# Altium PCB ESP32 with USBC PCB.PcbDoc (part 1 of 3)
Units mil, origin at the board's own origin, x right, y up, seen from the top; angles counter-clockwise.
Board outline 2700 x 1000 mil, 4 copper layers (L1, L2, L3, L4), stack 61.583 mil thick; 64 components, 73 nets, 299 pads, 161 vias.
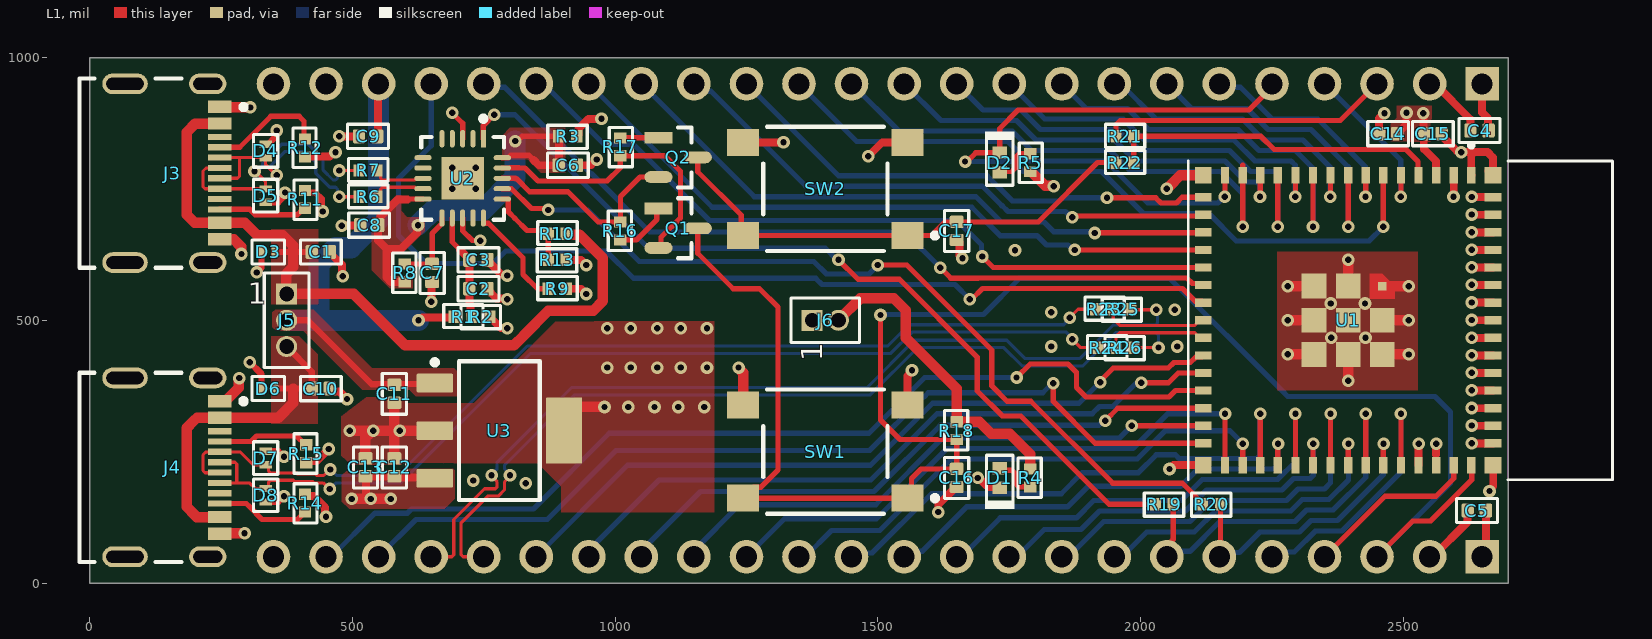
[diagram p0: L1 view]
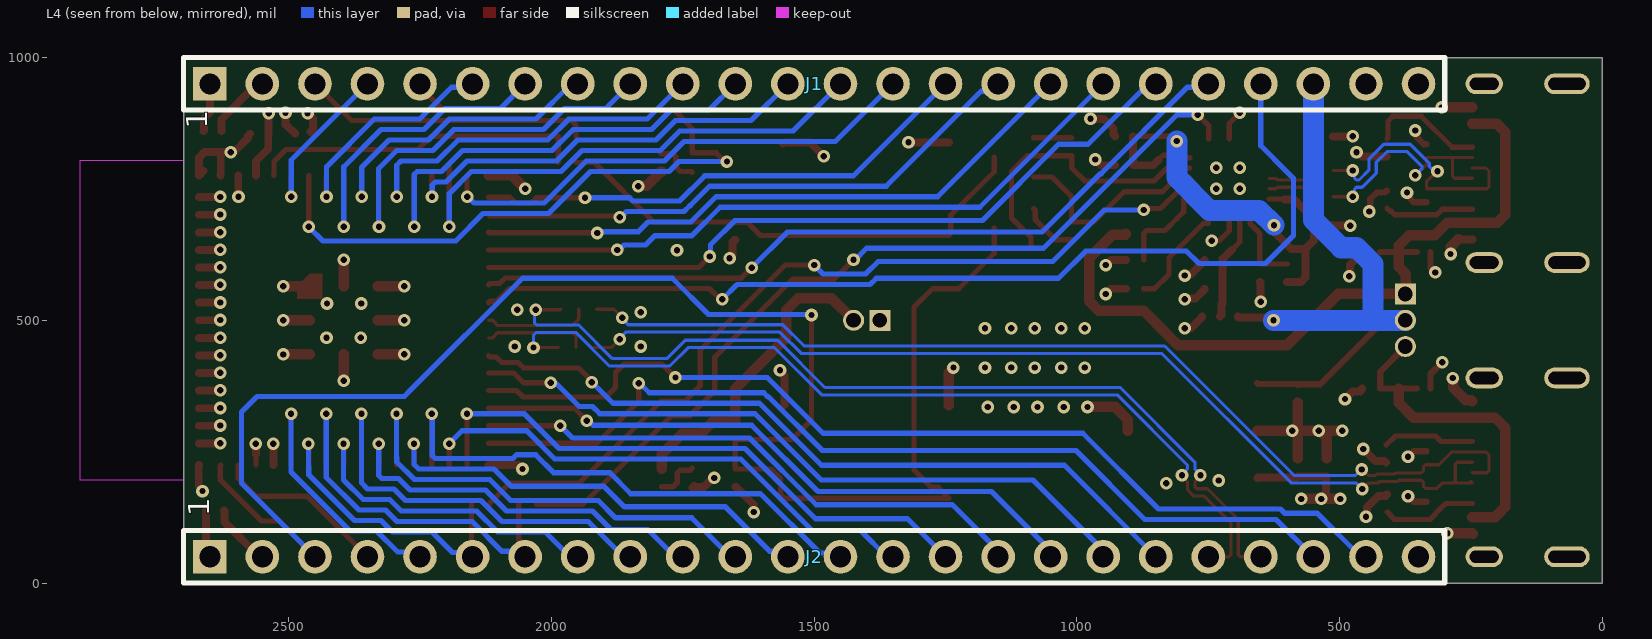
[diagram p1: L4 view, seen from below]
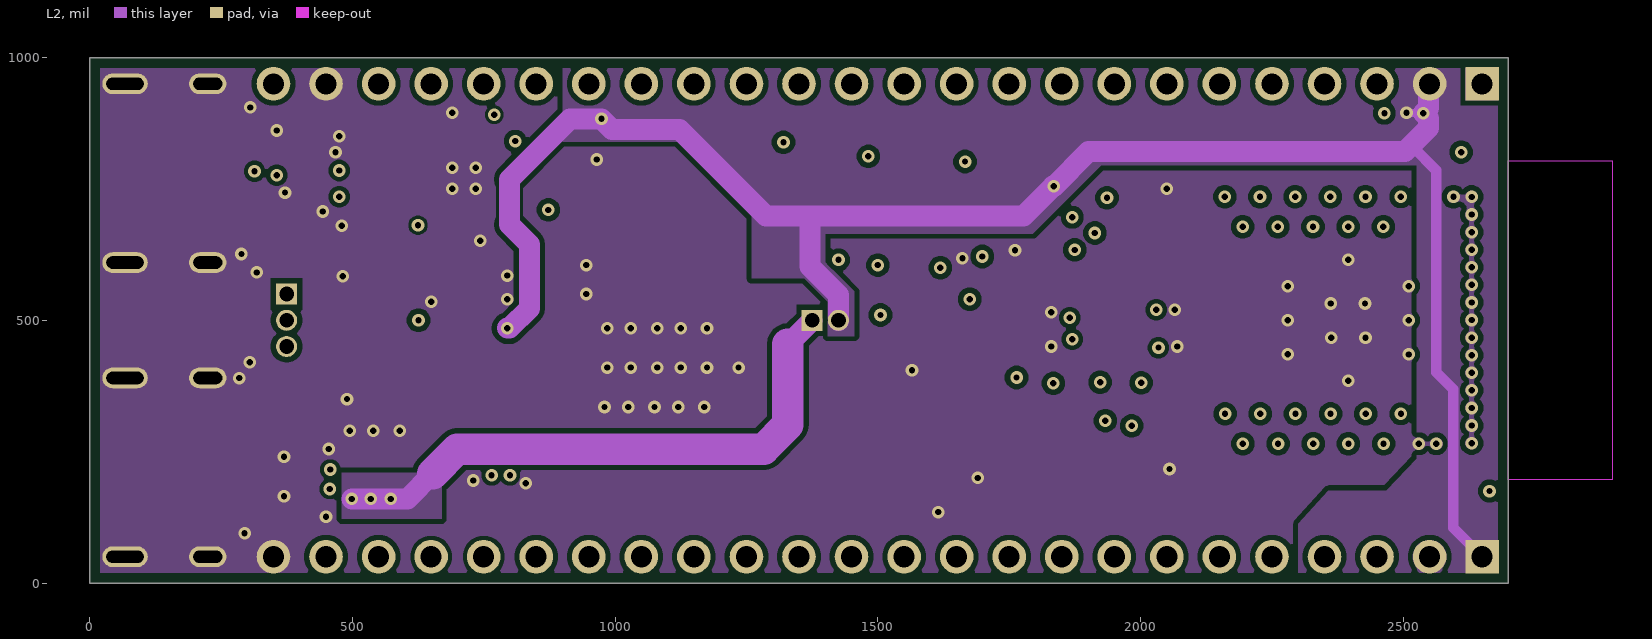
[diagram p2: L2]
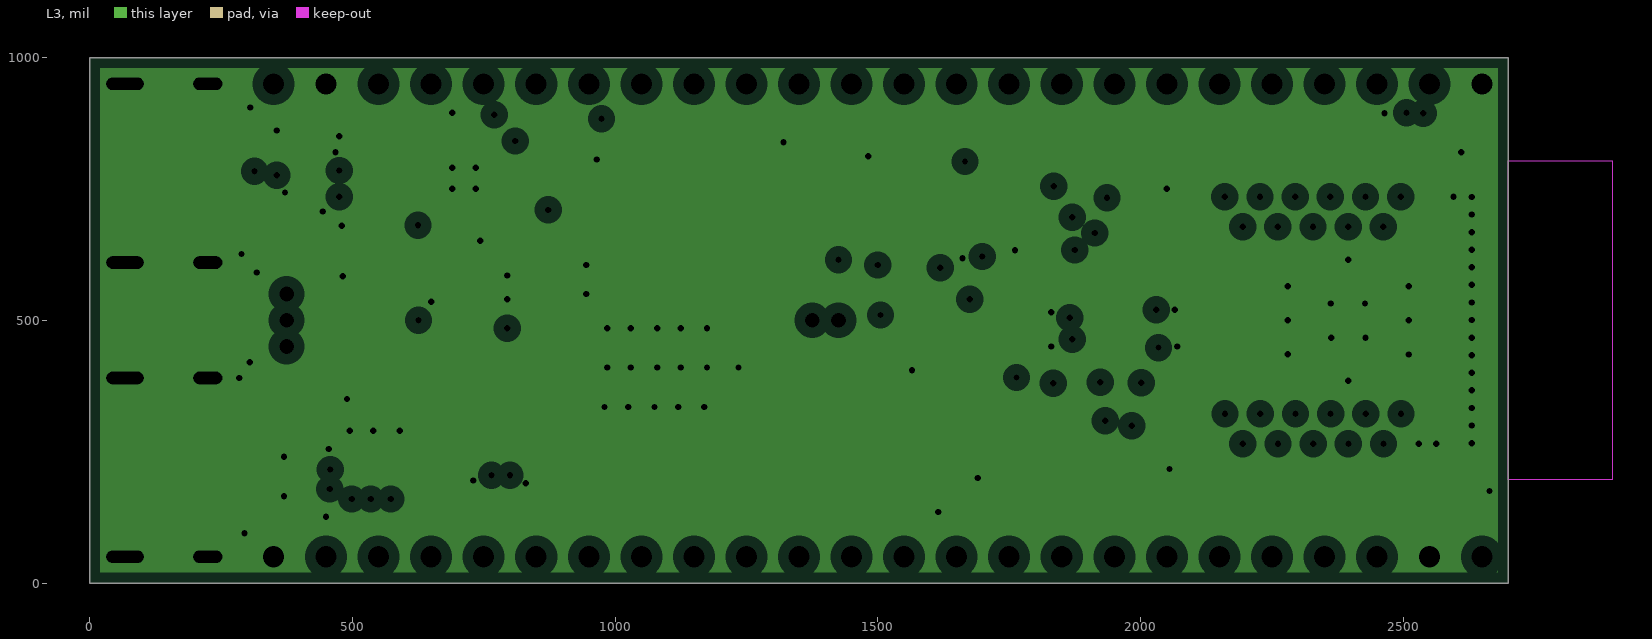
[diagram p3: L3, clearances drawn from the general rule]
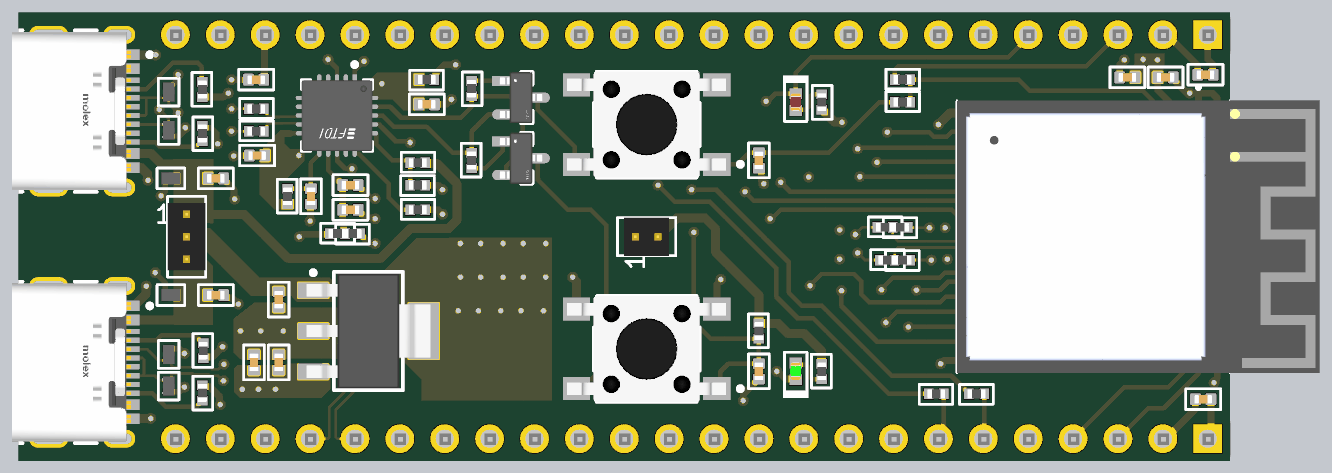
[diagram p4: 3D render of the assembled board from above, using the file's embedded part models]

## Layer stack, top to bottom
Top Solder: solder mask 0.4, Solder Resist, Dk 3.5
L1: signal copper 1.378
Dielectric 2: prepreg 3.9134, PP-006, Dk 4.1
L2: signal copper 0.5984
Dielectric 1: dielectric 49.8031, FR-4, Dk 4.8
L3: plane copper 0.5984, net GND
Dielectric 3: prepreg 3.9134, PP-006, Dk 4.1
L4: signal copper 1.378
Bottom Solder: solder mask 0.4, Solder Resist, Dk 3.5

## Board outline
0,0 2700,0 2700,1000 0,1000

## Design rules (kind name [scope] priority, off if disabled: settings)
Clearance SMALLER [WithinRoom('FTDI') OR WithinRoom('USBC2')   OR WithinRoom('USBC1')] p1: gap=6 ignorepadtopadclearanceinfootprint=FALSE
Clearance "DIFF90 Clearance" [InDifferentialPairClass('DIFF90')] p2: gap=8 ignorepadtopadclearanceinfootprint=FALSE
Clearance [All] p3: gap=10 ignorepadtopadclearanceinfootprint=FALSE except(6: SMDPad-SMDPad)
ComponentClearance R24R26 [InComponent('R24') vs InComponent('R26')] p1: gap=0 collisioncheckmode=3 verticalgap=0 showdistances=FALSE
ComponentClearance R23R25 [InComponent('R23') vs InComponent('R25')] p2: gap=0 collisioncheckmode=3 verticalgap=0 showdistances=FALSE
ComponentClearance R1R2 [InComponent('R1') vs InComponent('R2')] p3: gap=0 collisioncheckmode=3 verticalgap=0 showdistances=FALSE
ComponentClearance [All] p4: gap=10 collisioncheckmode=3 verticalgap=10 showdistances=FALSE
DiffPairsRouting DIFF90 [InDifferentialPairClass('DIFF90')] p1: maxlimit=8.1 minlimit=8 mostfreqgap=8 toplayer_minwidth=6.03 toplayer_maxwidth=6.23 toplayer_prefwidth=6.03 midlayer1_minwidth=5.1 midlayer1_maxwidth=5.2 midlayer1_prefwidth=5.1 bottomlayer_minwidth=6.03 bottomlayer_maxwidth=6.23 bottomlayer_prefwidth=6.03 maxuncoupledlength=500
PlaneClearance [All] p1: clearance=20
PlaneConnect [All] p1: pad.planeconnectstyle=Relief pad.reliefexpansion=20 pad.reliefentries=4 pad.reliefconductorwidth=20 pad.reliefairgap=10 via.planeconnectstyle=Direct via.reliefexpansion=20 via.reliefentries=4 via.reliefconductorwidth=10 via.reliefairgap=10
PolygonConnect [All] p1: connectstyle=Direct reliefconductorwidth=10 reliefentries=4 polygonreliefangle="90 Angle" airgapwidth=10
RoomDefinition FTDI [False vs False] p1: confinementstyle=ConfineIn formatcopy=TRUE lockcomponents=FALSE outline 607,660 809,660 809,905 607,905
RoomDefinition USBC1 [False vs False] p2: confinementstyle=ConfineIn formatcopy=TRUE lockcomponents=FALSE outline 190,930 310,930 310,630 190,630
RoomDefinition USBC2 [False vs False] p3: confinementstyle=ConfineIn formatcopy=TRUE lockcomponents=FALSE outline 199.55,369.55 305,369.55 305,69.55 199.55,69.55
RoutingVias [All] p1: holewidth=12 width=24 viastyle="Through Hole" minholewidth=12 minwidth=24 maxholewidth=12 maxwidth=24
SolderMaskExpansion [All] p1: expansion=2 istentingtop=FALSE
Width [All] p1: maxlimit=100 minlimit=10 preferedwidth=10 minimp=50.000000 maximp=50.000000 favimp=50.000000
26 further rules are at their usual default settings.

## Classes and differential pairs
differential pair class DIFF90: CON1_USB CON2_USB CON_ESP_USB ESP_USB FTDI_USB
differential pair FTDI_USB: +FTDI_USB_P -FTDI_USB_N
differential pair ESP_USB: +ESP_USB_P -ESP_USB_N
differential pair CON_ESP_USB: +CON_ESP_USB_P -CON_ESP_USB_N
differential pair CON2_USB: +CON2_USB_P -CON2_USB_N
differential pair CON1_USB: +CON1_USB_P -CON1_USB_N

## Components (designator, comment, footprint, x,y, rotation, side; value= is the part's Value field where it differs from the comment)
C1 "100nF, 50V" CAPC1005X65N 440,630 r180 top
C2 "4u7, 16V" CAPC1005X65N 740,560 r180 top
C3 "100nF, 50V" CAPC1005X65N 740,615 r180 top
C4 "100nF, 50V" CAPC1005X65N 2645,861 r180 top
C5 "100nF, 50V" CAPC1005X65N 2640,138 r0 top
C6 "100nF, 50V" CAPC1005X65N 910,795 r180 top
C7 "100nF, 50V" CAPC1005X65N 652,590 r90 top
C8 "100nF, 50V" CAPC1005X65N 532,681 r0 top
C9 "100nF, 50V" CAPC1005X65N 530,850 r0 top
C10 "100nF, 50V" CAPC1005X65N 440,370 r180 top
C11 "4u7, 16V" CAPC1005X65N 580,360 r90 top
C12 "10uF, 10V" CAPC1005X65N 580,220 r270 top
C13 "10uF, 10V" CAPC1005X65N 525,220 r270 top
C14 "10uF, 10V" CAPC1005X65N 2471,855 r0 top
C15 "100nF, 50V" CAPC1005X65N 2556,855 r180 top
C16 "1uF, 35V" CAPC1005X65N 1650,200 r270 top
C17 "100nF, 50V" CAPC1005X65N 1650,670 r90 top
D1 "GREEN" LED0402G 1732,200 r90 top
D2 "RED" LED0402R 1732,800 r270 top
D3 "AQ3045-01ETG" SOD882 340,630 r180 top locked
D4 "AQ3045-01ETG" SOD882 335,822.24 r90 top locked
D5 "AQ3045-01ETG" SOD882 335,737.2 r270 top locked
D6 "AQ3045-01ETG" SOD882 340,370 r180 top
D7 "AQ3045-01ETG" SOD882 335,237.8 r90 top
D8 "AQ3045-01ETG" SOD882 335,167.2 r270 top
J1 "22-28-4245" HDR_1X24_2.54MM 2650,950 r90 bottom locked
J2 "22-28-4245" HDR_1X24_2.54MM 2650,50 r90 bottom locked
J3 "2171790001" FP-2171790001-MFG 112.8,779.92 r270 top locked
J4 "2171790001" FP-2171790001-MFG 112.8,220.08 r270 top locked
J5 "FTS-103-01-F-S" HDR_1X3_1.27MM 375,550 r0 top locked
J6 "FTS-102-01-F-S" HDR_1X2_1.27MM 1375,500 r90 top locked
Q1 "SS8050-G" FP-SS8050-G-IPC_B 1120,675 r0 top
Q2 "SS8050-G" FP-SS8050-G-IPC_B 1120,810 r0 top
R1 "0R" RESC1005X37N 710.98,507 r0 top
R2 "0R" RESC1005X37N 744.99,507 r180 top
R3 "0R" RESC1005X37N 910,850 r180 top
R4 "1K" RESC1005X37N 1790,200 r90 top
R5 "1K" RESC1005X37N 1790,800 r270 top
R6 "27R" RESC1005X37N 530,735 r0 top
R7 "27R" RESC1005X37N 530,785 r0 top
R8 "0R" RESC1005X37N 600,590 r90 top
R9 "10K" RESC1005X37N 890,560 r0 top
R10 "4K7" RESC1005X37N 890,665 r0 top
R11 "5K1" RESC1005X37N 410,730 r270 top
R12 "5K1" RESC1005X37N 410,827.99 r90 top
R13 "10K" RESC1005X37N 890,615 r180 top
R14 "5K1" RESC1005X37N 410,152.01 r270 top
R15 "5K1" RESC1005X37N 412,246 r90 top
R16 "10K" RESC1005X37N 1010,670 r90 top
R17 "10K" RESC1005X37N 1010,830 r270 top
R18 "10K" RESC1005X37N 1650,290 r90 top
R19 "0R" RESC1005X37N 2045,150 r180 top
R20 "0R" RESC1005X37N 2135,150 r180 top
R21 "27R" RESC1005X37N 1970,850 r0 top
R22 "27R" RESC1005X37N 1970,800 r0 top
R23 "0R" RESC1005X37N 1930.98,521 r0 top locked
R24 "0R" RESC1005X37N 1935.98,448 r0 top locked
R25 "0R" RESC1005X37N 1965,521 r180 top locked
R26 "0R" RESC1005X37N 1970,448 r180 top locked
SW1 "PTS645SH50SMTR92 LFS" FP-PTS645SH50SMTR92LFS-MFG 1400,250 r180 top locked
SW2 "PTS645SH50SMTR92 LFS" FP-PTS645SH50SMTR92LFS-MFG 1400,750 r180 top locked
U1 "ESP32-S3-MINI-1-N8" XCVR_ESP32-S3-MINI-1-N8 2395.04,500 r270 top locked
U2 "FT231XQ-R" FP-QFN-20-IPC_B 710,770 r270 top locked
U3 "TL1963A-33DCYR" DCY0004A_N 780,290 r0 top locked

## Footprints (in the part's own frame and the unit in brackets; to place one, negate y for a bottom-side part, rotate by r counter-clockwise, add the part's x,y. Pads: shape width x height; smd on the part's side, far side on the other; paste and mask are expansions set on the pad)
CAPC1005X65N [mm]
  rrect25% 0.6x0.67 smd: 1(-0.437,0) 2(0.437,0)
  silkscreen extent -0.99,-0.59 0.99,0.59, body extent -0.5,-0.25 0.5,0.25, height 0.65
DCY0004A_N [mm] "SOT223, 4-Leads, Body 6.7x3.7mm, Pitch 2.3mm, IPC Medium Density"
  rrect11% 1.75x0.9 smd: 1(-3.125,2.3) 2(-3.125,0) 3(-3.125,-2.3)
  rrect6% 1.75x3.2 smd: 4(3.125,0)
  silkscreen extent -3.25,-3.35 1.95,3.42, body extent -3.5,-3.25 3.5,3.25, height 1.62
FP-2171790001-MFG [mm]
  rect 0.6x1.15 smd paste+0 mask+0: A1B12(-3.2,3.425) A4B9(-2.4,3.425) B1A12(3.2,3.425) B4A9(2.4,3.425)
  rect 0.3x1.15 smd paste+0 mask+0: A5(-1.25,3.425) A6(-0.25,3.425) A7(0.25,3.425) A8(1.25,3.425) B5(1.75,3.425) B6(0.75,3.425) B7(-0.75,3.425) B8(-1.75,3.425)
  rrect100% 1x1.8 hole 1.4 slot 0.6 at 0 deg paste-1000 mask+0: S1(-4.32,2.85) S2(4.32,2.85)
  rrect100% 1x2.2 hole 1.8 slot 0.6 at 0 deg paste-1000 mask+0: S3(-4.32,-1.15) S4(4.32,-1.15)
  silkscreen extent -4.57,-3.35 4.57,4.7, body extent -4.92,-3.45 4.92,4.1, height 0.25
FP-PTS645SH50SMTR92LFS-MFG [mm]
  rect 1.55x1.3 smd paste+0 mask+0: 1(-3.975,2.25) 2(3.975,2.25) 3(-3.975,-2.25) 4(3.975,-2.25)
  silkscreen extent -5.43,-3 3,3, body extent -4.5,-3 4.5,3, height 4.3
FP-QFN-20-IPC_B [mm]
  rect 0.84x0.242 smd paste+0 mask+0: 1(-1.916,1)
  rrect100% 0.84x0.242 smd paste+0 mask+0: 2(-1.916,0.5) 3(-1.916,0) 4(-1.916,-0.5) 5(-1.916,-1) 11(1.916,-1) 12(1.916,-0.5) 13(1.916,0) 14(1.916,0.5) 15(1.916,1)
  rrect100% 0.242x0.84 smd paste+0 mask+0: 6(-1,-1.916) 7(-0.5,-1.916) 8(0,-1.916) 9(0.5,-1.916) 10(1,-1.916) 16(1,1.916) 17(0.5,1.916) 18(0,1.916) 19(-0.5,1.916) 20(-1,1.916)
  rect 2.05x2.05 smd paste-1000 mask+0: 21(0,0)
  silkscreen extent -3.01,-2 2,2, body extent -2.59,-2.59 2.59,2.59, height 0.25
FP-SS8050-G-IPC_B [mm]
  rect 1.357x0.572 smd paste+0 mask+0: 1(-0.951,0.95)
  rrect100% 1.357x0.572 smd paste+0 mask+0: 2(-0.951,-0.95) 3(0.951,0)
  silkscreen extent 0,-1.45 0.65,1.45, body extent -1.88,-1.7 1.88,1.7, height 0.25
HDR_1X2_1.27MM [mil]
  rect 40x40 hole 28: 1(0,0)
  round 40 hole 28: 2(0,-50)
  silkscreen extent -42,-90 43,40, body extent -42,-75 43,25, height 154
HDR_1X3_1.27MM [mil]
  rect 40x40 hole 28: 1(0,0)
  round 40 hole 28: 2(0,-50) 3(0,-100)
  silkscreen extent -42,-140 42,40, body extent -42,-125 42,25, height 154
HDR_1X24_2.54MM [mil]
  rect 64x64 hole 40: 1(0,0)
  round 64 hole 40: 2(0,-100) 3(0,-200) 4(0,-300) 5(0,-400) 6(0,-500) 7(0,-600) 8(0,-700) 9(0,-800) 10(0,-900) 11(0,-1000) 12(0,-1100) 13(0,-1200) 14(0,-1300) 15(0,-1400) 16(0,-1500) 17(0,-1600) 18(0,-1700) 19(0,-1800) 20(0,-1900) 21(0,-2000) 22(0,-2100) 23(0,-2200) 24(0,-2300)
  silkscreen extent -50,-2350 50,50, body extent -50,-2349 48,51, height 386
LED0402G [mm]
  rect 0.6x0.7 smd: 1(-0.475,0) 2(0.475,0)
  silkscreen extent -1.5,-0.71 1.09,0.71, body extent -0.5,-0.3 0.5,0.3, height 0.21
LED0402R [mm]
  rect 0.6x0.7 smd: 1(-0.475,0) 2(0.475,0)
  silkscreen extent -1.5,-0.71 1.09,0.71, body extent -0.5,-0.3 0.5,0.3, height 0.2
RESC1005X37N [mm]
  rect 0.54x0.6 smd: 1(-0.432,0) 2(0.432,0)
  silkscreen extent -0.94,-0.53 0.97,0.58, body extent -0.5,-0.25 0.5,0.25, height 0.37
SOD882 [mm]
  rect 0.35x0.6 smd: 1(-0.325,0) 2(0.325,0)
  silkscreen extent -0.79,-0.58 0.79,0.58, body extent -0.54,-0.34 0.54,0.34, height 0.44
XCVR_ESP32-S3-MINI-1-N8 [mm]
  rect 0.8x0.4 smd: 1(-7,5.95) 2(-7,5.1) 3(-7,4.25) 4(-7,3.4) 5(-7,2.55) 6(-7,1.7) 7(-7,0.85) 8(-7,0) 9(-7,-0.85) 10(-7,-1.7) 11(-7,-2.55) 12(-7,-3.4) 13(-7,-4.25) 14(-7,-5.1) 15(-7,-5.95) 31(7,-5.95) 32(7,-5.1) 33(7,-4.25) 34(7,-3.4) 35(7,-2.55) 36(7,-1.7) 37(7,-0.85) 38(7,0) 39(7,0.85) 40(7,1.7) 41(7,2.55) 42(7,3.4) 43(7,4.25) 44(7,5.1) 45(7,5.95)
  rect 0.4x0.8 smd: 16(-5.95,-7) 17(-5.1,-7) 18(-4.25,-7) 19(-3.4,-7) 20(-2.55,-7) 21(-1.7,-7) 22(-0.85,-7) 23(0,-7) 24(0.85,-7) 25(1.7,-7) 26(2.55,-7) 27(3.4,-7) 28(4.25,-7) 29(5.1,-7) 30(5.95,-7) 46(5.95,7) 47(5.1,7) 48(4.25,7) 49(3.4,7) 50(2.55,7) 51(1.7,7) 52(0.85,7) 53(0,7) 54(-0.85,7) 55(-1.7,7) 56(-2.55,7) 57(-3.4,7) 58(-4.25,7) 59(-5.1,7) 60(-5.95,7)
  rect 1.2x1.2 smd: 61(0,0) 67(0,1.65) 68(1.65,1.65) 69(-1.65,0) 70(1.65,0) 71(-1.65,-1.65) 72(0,-1.65) 73(1.65,-1.65)
  rect 0.8x0.8 smd: 62(-7,7) 63(-7,-7) 64(7,-7) 65(7,7)
  rect 0.4x0.4 smd paste-1 mask+0: 66(-1.65,1.65)
  L1 region: -1.05,1.05 -2.25,1.05 -2.25,1.65 -1.65,2.25 -1.05,2.25
  Keep-Out Layer region: 7.7,7.725 -7.7,7.725 -7.7,12.775 7.7,12.775
  Keep-Out Layer region: 7.7,7.725 -7.7,7.725 -7.7,12.775 7.7,12.775
  silkscreen extent -8.55,-7.73 7.7,12.78, body extent -7.7,-7.71 7.7,12.79, height 2.56

## Part data
C1 C3 C4 C5 C6 C7 C8 C9 C10 C15 C17: library part CL05B104KB54PNC, "CAP CER 0.1UF 50V X7R 0402", Capacitance=100nF, Case/Package=0402, Dielectric Material=Ceramic, LCSC Part Number=C307331, Manufacturer="Samsung Electro-Mechanics", Max Operating Temperature=125°C, Min Operating Temperature=-55°C, Tolerance=10%, Voltage Rating=50V, Category="Ceramic Capacitors", China RoHS=Compliant, ComponentLink1Description=https://datasheet.octopart.com:443/CL05B104KB54PNC-Samsung-Electro-Mechanics-datasheet-182018727.pdf?src-supplier=IHS, ComponentLink1URL=https://datasheet.octopart.com:443/CL05B104KB54PNC-Samsung-Electro-Mechanics-datasheet-182018727.pdf?src-supplier=IHS, ComponentLink2Description=https://datasheet.octopart.com:443/CL05B104KB54PNC-Samsung-Electro-Mechanics-datasheet-138685816.pdf?src-supplier=Samsung+SCT, ComponentLink2URL=https://datasheet.octopart.com:443/CL05B104KB54PNC-Samsung-Electro-Mechanics-datasheet-138685816.pdf?src-supplier=Samsung+SCT, ComponentLink3Description=https://datasheet.octopart.com:443/CL05B104KB54PNC-Samsung-datasheet-8326407.pdf?src-supplier=TME, ComponentLink3URL=https://datasheet.octopart.com:443/CL05B104KB54PNC-Samsung-datasheet-8326407.pdf?src-supplier=TME, Country of Origin="Mainland China, Philippines, South Korea", Export Control Classification Number (ECCN) Code=EAR99, Harmonized Tariff Schedule (HTS) Code=8532.24.00.20, Height=500µm, Introduction Date=2018-07-31, Length=1mm, Lifecycle Status=Production, Manufacturer Part Number=CL05B104KB54PNC, Material=Ceramic, Mount="Surface Mount", Number of Terminals=2, Pricing 1="1=0.1, 10=0.036, 50=0.0246, 100=0.021, 500=0.01504, 1000=0.01387, 2500=0.01366, 5000=0.0129 (USD)", REACH SVHC=Yes, RoHS=Compliant, Schedule B="8532240020, 8532240020|8532240020|8532240020|8532240020|8532240020|8532240020|8532240020|8532240020|8532240020|8532240020|8532240020|8532240020|8532240020|8532240020|8532240020|8532240020|8532240020|8532240020|8532240020|8532240020|8532240020|8532240020|8532240020|85", Stock 1=262250, Supplier 1=DigiKey, Voltage Rating (DC)=50V, Width=500µm
C2 C11: library part CL05A475MO5NUNC, "CAP CER 4.7UF 16V X5R 0402", Capacitance=4.7µF, Case Code (Imperial)=0402, Case Code (Metric)=1005, Dielectric=X5R, Dielectric Material=Ceramic, LCSC Part Number=C318563, Manufacturer="Samsung Electro-Mechanics", Max Operating Temperature=85°C, Min Operating Temperature=-55°C, Supplier Part Number 1=1276-6836-1-ND, Tolerance=20%, Voltage Rating=16V, Case/Package=0402, Category="Ceramic Capacitors", China RoHS=Compliant, ComponentLink1Description=https://datasheet.octopart.com:443/CL05A475MO5NUNC-Samsung-Electro-Mechanics-datasheet-178175196.pdf?src-supplier=Farnell, ComponentLink1URL=https://datasheet.octopart.com:443/CL05A475MO5NUNC-Samsung-Electro-Mechanics-datasheet-178175196.pdf?src-supplier=Farnell, ComponentLink2Description=https://datasheet.octopart.com:443/CL05A475MO5NUNC-Samsung-Electro-Mechanics-datasheet-123102911.pdf?src-supplier=Future+Electronics, ComponentLink2URL=https://datasheet.octopart.com:443/CL05A475MO5NUNC-Samsung-Electro-Mechanics-datasheet-123102911.pdf?src-supplier=Future+Electronics, ComponentLink3Description=https://datasheet.octopart.com:443/CL05A475MO5NUNC-Samsung-Electro-Mechanics-datasheet-110226225.pdf?src-supplier=Future+Electronics, ComponentLink3URL=https://datasheet.octopart.com:443/CL05A475MO5NUNC-Samsung-Electro-Mechanics-datasheet-110226225.pdf?src-supplier=Future+Electronics, ComponentLink4Description=https://datasheet.octopart.com:443/CL05A475MO5NUNC-Samsung-Electro-Mechanics-datasheet-83567908.pdf?src-supplier=Future+Electronics, ComponentLink4URL=https://datasheet.octopart.com:443/CL05A475MO5NUNC-Samsung-Electro-Mechanics-datasheet-83567908.pdf?src-supplier=Future+Electronics, ComponentLink5Description=https://datasheet.octopart.com:443/CL05A475MO5NUNC-Samsung-Electro-Mechanics-datasheet-68297032.pdf?src-supplier=Future+Electronics, ComponentLink5URL=https://datasheet.octopart.com:443/CL05A475MO5NUNC-Samsung-Electro-Mechanics-datasheet-68297032.pdf?src-supplier=Future+Electronics, ComponentLink6Description=https://datasheet.octopart.com:443/CL05A475MO5NUNC-Samsung-Electro-Mechanics-datasheet-87580057.pdf?src-supplier=Future+Electronics, ComponentLink6URL=https://datasheet.octopart.com:443/CL05A475MO5NUNC-Samsung-Electro-Mechanics-datasheet-87580057.pdf?src-supplier=Future+Electronics, ComponentLink7Description=https://datasheet.octopart.com:443/CL05A475MO5NUNC-Samsung-Electro-Mechanics-datasheet-149136694.pdf?src-supplier=Future+Electronics, ComponentLink7URL=https://datasheet.octopart.com:443/CL05A475MO5NUNC-Samsung-Electro-Mechanics-datasheet-149136694.pdf?src-supplier=Future+Electronics, Height=500µm, Length=1mm, Lifecycle Status=Production, Manufacturer Part Number=CL05A475MO5NUNC, Material=Ceramic, Mount="Surface Mount", Number of Terminals=2, Pricing 1="1=0.08 (USD)", REACH SVHC=Yes, RoHS=Compliant, Schedule B="8532240020, 8532240020|8532240020, 8532240020|8532240020|8532240020, 8532240020|8532240020|8532240020|8532240020", Stock 1=160567, Supplier 1=DigiKey, Thickness=558.8µm, Voltage Rating (DC)=16V, Width=500µm
C12 C13 C14: library part CL05A106MP8NUB8, "CAP CER 10UF 10V X5R 0402", Capacitance=10µF, Case Code (Imperial)=0402, Case Code (Metric)=1005, Dielectric Material=Ceramic, LCSC Part Number=C307415, Manufacturer="Samsung Electro-Mechanics", Max Operating Temperature=85°C, Min Operating Temperature=-55°C, Supplier Part Number 1=1276-6830-1-ND, Tolerance=20%, Voltage Rating=10V, Case/Package=0402, Category="Ceramic Capacitors", China RoHS=Compliant, ComponentLink1Description=https://datasheet.octopart.com:443/CL05A106MP8NUB8-Samsung-Electro-Mechanics-datasheet-136460857.pdf?src-supplier=IHS, ComponentLink1URL=https://datasheet.octopart.com:443/CL05A106MP8NUB8-Samsung-Electro-Mechanics-datasheet-136460857.pdf?src-supplier=IHS, ComponentLink2Description=https://datasheet.octopart.com:443/CL05A106MP8NUB8-Samsung-Electro-Mechanics-datasheet-181551178.pdf?src-supplier=Newark, ComponentLink2URL=https://datasheet.octopart.com:443/CL05A106MP8NUB8-Samsung-Electro-Mechanics-datasheet-181551178.pdf?src-supplier=Newark, ComponentLink3Description=https://datasheet.octopart.com:443/CL05A106MP8NUB8-Samsung-Electro-Mechanics-datasheet-136031724.pdf?src-supplier=Newark, ComponentLink3URL=https://datasheet.octopart.com:443/CL05A106MP8NUB8-Samsung-Electro-Mechanics-datasheet-136031724.pdf?src-supplier=Newark, ComponentLink4Description=https://datasheet.octopart.com:443/CL05A106MP8NUB8-Samsung-Electro-Mechanics-datasheet-141346815.pdf?src-supplier=Samsung+SCT, ComponentLink4URL=https://datasheet.octopart.com:443/CL05A106MP8NUB8-Samsung-Electro-Mechanics-datasheet-141346815.pdf?src-supplier=Samsung+SCT, ComponentLink5Description=https://datasheet.octopart.com:443/CL05A106MP8NUB8-Samsung-Electro-Mechanics-datasheet-110326781.pdf?src-supplier=Future+Electronics, ComponentLink5URL=https://datasheet.octopart.com:443/CL05A106MP8NUB8-Samsung-Electro-Mechanics-datasheet-110326781.pdf?src-supplier=Future+Electronics, ComponentLink6Description=https://datasheet.octopart.com:443/CL05A106MP8NUB8-Samsung-Electro-Mechanics-datasheet-96443587.pdf?src-supplier=Future+Electronics, ComponentLink6URL=https://datasheet.octopart.com:443/CL05A106MP8NUB8-Samsung-Electro-Mechanics-datasheet-96443587.pdf?src-supplier=Future+Electronics, ComponentLink7Description=https://datasheet.octopart.com:443/CL05A106MP8NUB8-Samsung-Electro-Mechanics-datasheet-68297032.pdf?src-supplier=Future+Electronics, ComponentLink7URL=https://datasheet.octopart.com:443/CL05A106MP8NUB8-Samsung-Electro-Mechanics-datasheet-68297032.pdf?src-supplier=Future+Electronics, ComponentLink8Description=https://datasheet.octopart.com:443/CL05A106MP8NUB8-Samsung-Electro-Mechanics-datasheet-86032222.pdf?src-supplier=Future+Electronics, ComponentLink8URL=https://datasheet.octopart.com:443/CL05A106MP8NUB8-Samsung-Electro-Mechanics-datasheet-86032222.pdf?src-supplier=Future+Electronics, Country of Origin="Mainland China, Philippines, South Korea", Export Control Classification Number (ECCN) Code=EAR99, Harmonized Tariff Schedule (HTS) Code=8532.24.00.20, Height=800µm, Introduction Date=2014-02-27, Length=1mm, Lifecycle Status=Production, Manufacturer Part Number=CL05A106MP8NUB8, Material=Ceramic, Mount="Surface Mount", Number of Terminals=2, Pricing 1="1=0.13, 10=0.069 (USD)", REACH SVHC=Yes, RoHS=Compliant, Schedule B="8532240020, 8532240020|8532240020, 8532240020|8532240020|8532240020, 8532240020|8532240020|8532240020|8532240020", Stock 1=259358, Supplier 1=DigiKey, Thickness=889µm, Voltage Rating (DC)=10V, Width=500µm
C16: library part CL05A105KL5NRNC, "CAP CER 1UF 35V X5R 0402", Capacitance=1µF, Case Code (Imperial)=0402, Case Code (Metric)=1005, Dielectric Material=Ceramic, LCSC Part Number=C307413, Manufacturer="Samsung Electro-Mechanics", Max Operating Temperature=85°C, Min Operating Temperature=-55°C, Supplier Part Number 1=1276-6796-1-ND, Tolerance=10%, Voltage Rating=35V, Case/Package=0402, Category="Ceramic Capacitors", China RoHS=Compliant, ComponentLink1Description=https://datasheet.octopart.com:443/CL05A105KL5NRNC-Samsung-Electro-Mechanics-datasheet-182018568.pdf?src-supplier=IHS, ComponentLink1URL=https://datasheet.octopart.com:443/CL05A105KL5NRNC-Samsung-Electro-Mechanics-datasheet-182018568.pdf?src-supplier=IHS, ComponentLink2Description=https://datasheet.octopart.com:443/CL05A105KL5NRNC-Samsung-Electro-Mechanics-datasheet-141346806.pdf?src-supplier=Samsung+SCT, ComponentLink2URL=https://datasheet.octopart.com:443/CL05A105KL5NRNC-Samsung-Electro-Mechanics-datasheet-141346806.pdf?src-supplier=Samsung+SCT, ComponentLink3Description=https://datasheet.octopart.com:443/CL05A105KL5NRNC-Samsung-datasheet-8326407.pdf?src-supplier=TME, ComponentLink3URL=https://datasheet.octopart.com:443/CL05A105KL5NRNC-Samsung-datasheet-8326407.pdf?src-supplier=TME, Country of Origin="Mainland China, Philippines, South Korea", Export Control Classification Number (ECCN) Code=EAR99, Harmonized Tariff Schedule (HTS) Code=8532.24.00.20, Height=550µm, Introduction Date=2013-03-18, Length=990.6µm, Lifecycle Status=Production, Manufacturer Part Number=CL05A105KL5NRNC, Material=Ceramic, Mount="Surface Mount", Number of Terminals=2, Pricing 1="1=0.27, 10=0.159, 50=0.1154, 100=0.1019, 500=0.07928, 1000=0.07231, 2500=0.06496, 5000=0.06054 (USD)", REACH SVHC=Yes, RoHS=Compliant, Schedule B="8532240020, 8532240020|8532240020|8532240020|8532240020|8532240020", Stock 1=138065, Supplier 1=DigiKey, Thickness=558.8µm, Voltage Rating (DC)=35V, Width=508µm
D1: library part VLMTG1500-GS08, "LED GREEN 0402 SMD", Forward Current=20mA, Forward Voltage=3.1V, LCSC Part Number=C20346084, Manufacturer=Vishay, Max Operating Temperature=80°C, Min Operating Temperature=-20°C, Reverse Voltage=5V, Supplier Part Number 1=751-VLMTG1500-GS08CT-ND, Category=LEDs, ComponentLink1Description=https://datasheet.octopart.com:443/VLMTG1500-GS08-Vishay-datasheet-181477802.pdf?src-supplier=IHS, ComponentLink1URL=https://datasheet.octopart.com:443/VLMTG1500-GS08-Vishay-datasheet-181477802.pdf?src-supplier=IHS, ComponentLink2Description=http://sigma.octopart.com:80/rohs_statement/Vishay-company-15.pdf?src-supplier=Compliance+Statements, ComponentLink2URL=http://sigma.octopart.com:80/rohs_statement/Vishay-company-15.pdf?src-supplier=Compliance+Statements, Country of Origin="Mainland China", Harmonized Tariff Schedule (HTS) Code=8541.40.20.00, Height=350µm, Introduction Date=2017-05-22, Lifecycle Status=Production, Luminous Intensity=28mcd, Manufacturer Part Number=VLMTG1500-GS08, Mount="Surface Mount", Number of Circuits=1, Number of Terminals=2, Peak Wavelength=527.5nm, Pricing 1="1=0.33, 10=0.229, 100=0.1617, 500=0.13126, 1000=0.12121 (USD)", RoHS=Compliant, Shape=Rectangular, Stock 1=14859, Supplier 1=DigiKey, Terminal Pitch=675µm, Viewing Angle=130°
D2: library part VLMS1500-GS08, "LED RED 0402 SMD", Case Code (Imperial)=0402, Case Code (Metric)=1005, Color=Red, Forward Current=30mA, Forward Voltage=2.4V, LCSC Part Number=C511370, Manufacturer=Vishay, Max Operating Temperature=85°C, Min Operating Temperature=-30°C, Power Rating=75mW, Reverse Voltage=5V, Supplier Part Number 1=VLMS1500-GS08CT-ND, Test Current=20mA, Case/Package=0402, Category=LEDs, ComponentLink1Description=https://datasheet.octopart.com:443/VLMS1500-GS08-Vishay-datasheet-181477802.pdf?src-supplier=IHS, ComponentLink1URL=https://datasheet.octopart.com:443/VLMS1500-GS08-Vishay-datasheet-181477802.pdf?src-supplier=IHS, ComponentLink2Description=https://datasheet.octopart.com:443/VLMS1500-GS08-Vishay-datasheet-21227148.pdf?src-supplier=Future+Electronics, ComponentLink2URL=https://datasheet.octopart.com:443/VLMS1500-GS08-Vishay-datasheet-21227148.pdf?src-supplier=Future+Electronics, ComponentLink3Description=https://datasheet.octopart.com:443/VLMS1500-GS08-Vishay-datasheet-102762782.pdf?src-supplier=Future+Electronics, ComponentLink3URL=https://datasheet.octopart.com:443/VLMS1500-GS08-Vishay-datasheet-102762782.pdf?src-supplier=Future+Electronics, ComponentLink4Description=https://datasheet.octopart.com:443/VLMS1500-GS08-Vishay-datasheet-33014519.pdf?src-supplier=element14+APAC, ComponentLink4URL=https://datasheet.octopart.com:443/VLMS1500-GS08-Vishay-datasheet-33014519.pdf?src-supplier=element14+APAC, ComponentLink5Description=https://datasheet.octopart.com:443/VLMS1500-GS08-Vishay-datasheet-68326145.pdf?src-supplier=TME, ComponentLink5URL=https://datasheet.octopart.com:443/VLMS1500-GS08-Vishay-datasheet-68326145.pdf?src-supplier=TME, ComponentLink6Description=https://datasheet.octopart.com:443/VLMS1500-GS08-Vishay-Siliconix-datasheet-62309867.pdf?src-supplier=RS+(Formerly+Allied+Electronics), ComponentLink6URL=https://datasheet.octopart.com:443/VLMS1500-GS08-Vishay-Siliconix-datasheet-62309867.pdf?src-supplier=RS+(Formerly+Allied+Electronics), ComponentLink7Description=https://datasheet.octopart.com:443/VLMS1500-GS08-Vishay-datasheet-62332426.pdf?src-supplier=Newark, ComponentLink7URL=https://datasheet.octopart.com:443/VLMS1500-GS08-Vishay-datasheet-62332426.pdf?src-supplier=Newark, ComponentLink8Description=https://datasheet.octopart.com/VLMS1500-GS08-Vishay-datasheet-16093911.pdf, ComponentLink8URL=https://datasheet.octopart.com/VLMS1500-GS08-Vishay-datasheet-16093911.pdf, ComponentLink9Description=http://sigma.octopart.com:80/rohs_statement/Vishay-company-15.pdf?src-supplier=Compliance+Statements, ComponentLink9URL=http://sigma.octopart.com:80/rohs_statement/Vishay-company-15.pdf?src-supplier=Compliance+Statements, Country of Origin="Mainland China", Dominant Wavelength=631nm, Harmonized Tariff Schedule (HTS) Code=8541.40.20.00, Height=350µm, Illumination Color=Red, Introduction Date=2012-07-08, Lead Free="Lead Free", Length=1mm, Lens Style="Rectangular, Square", Lifecycle Status=Production, Luminous Intensity=18mcd, Manufacturer Part Number=VLMS1500-GS08, Mount="Surface Mount", Number of Circuits=1, Number of LEDs=1, Number of Pins=2, Number of Terminals=2, Packaging="Cut Tape", Peak Wavelength=631nm, Pricing 1="1=0.25, 10=0.17, 100=0.1194, 500=0.09602, 1000=0.08829 (USD)", Radiation Hardening=No, REACH SVHC=Yes, RoHS=Compliant, Schedule B="8541402000, 8541402000|8541402000|8541402000|8541402000|8541402000", Shape=Rectangular, Stock 1=79453, Supplier 1=DigiKey, Terminal Pitch=675µm, Viewing Angle=130°, Wavelength=631nm, Width=500µm
D3 D4 D5 D6 D7 D8: "TVS DIODE 5.3VWM 12VC SOD882", Breakdown Voltage=7.8V, Clamping Voltage=12V, LCSC Part Number=C3710326, Leakage Current=100nA, Manufacturer=Littelfuse, Max Breakdown Voltage=9V, Max Operating Temperature=150°C, Min Breakdown Voltage=6.8V, Min Operating Temperature=-40°C, Operating Supply Voltage=5.3V, Peak Pulse Power=40W, Supplier Part Number 1=F9321CT-ND, Category="TVS Diodes", ComponentLink1Description=https://datasheet.octopart.com:443/AQ3045-01ETG-Littelfuse-datasheet-180606588.pdf?src-supplier=IHS, ComponentLink1URL=https://datasheet.octopart.com:443/AQ3045-01ETG-Littelfuse-datasheet-180606588.pdf?src-supplier=IHS, ComponentLink2Description=https://datasheet.octopart.com:443/AQ3045-01ETG-Littelfuse-datasheet-140480283.pdf?src-supplier=ODG+(Origin+Data+Global), ComponentLink2URL=https://datasheet.octopart.com:443/AQ3045-01ETG-Littelfuse-datasheet-140480283.pdf?src-supplier=ODG+(Origin+Data+Global), ComponentLink3Description=https://datasheet.octopart.com:443/AQ3045-01ETG-Littelfuse-datasheet-101609968.pdf?src-supplier=Farnell, ComponentLink3URL=https://datasheet.octopart.com:443/AQ3045-01ETG-Littelfuse-datasheet-101609968.pdf?src-supplier=Farnell, ComponentLink4Description=https://datasheet.octopart.com:443/AQ3045-01ETG-Littelfuse-datasheet-183003566.pdf?src-supplier=JRH+Electronics, ComponentLink4URL=https://datasheet.octopart.com:443/AQ3045-01ETG-Littelfuse-datasheet-183003566.pdf?src-supplier=JRH+Electronics, ComponentLink5Description=https://datasheet.octopart.com:443/AQ3045-01ETG-Littelfuse-datasheet-170904929.pdf?src-supplier=Future+Electronics, ComponentLink5URL=https://datasheet.octopart.com:443/AQ3045-01ETG-Littelfuse-datasheet-170904929.pdf?src-supplier=Future+Electronics, Lifecycle Status=Production, Manufacturer Part Number=AQ3045-01ETG, Mount="Surface Mount", Number of Channels=1, Number of Elements=1, Number of Terminals=2, Packaging="Cut Tape", Peak Reverse Current=100nA, Polarity=Bidirectional, Pricing 1="1=0.43, 10=0.262, 100=0.138, 500=0.131 (USD)", REACH SVHC=Yes, Reverse Standoff Voltage=5.3V, RoHS=Compliant, Stock 1=26845, Supplier 1=DigiKey
J1 J2: "CONN HEADER VERT 24POS 2.54MM", Contact Resistance=20mΩ, Current Rating=4A, Housing Color=Black, Insulation Resistance=50GΩ, LCSC Part Number=C7145888, Manufacturer=Molex, Manufacturer Lifecycle Status=ACTIVE, Max Operating Temperature=75°C, Min Operating Temperature=-40°C, Supplier Part Number 1=900-0022284245-ND, Category="Headers and Wire Housings", China RoHS=Compliant, ComponentLink1Description=https://datasheet.octopart.com:443/22-28-4245-Molex-datasheet-166051265.pdf?src-supplier=IHS, ComponentLink1URL=https://datasheet.octopart.com:443/22-28-4245-Molex-datasheet-166051265.pdf?src-supplier=IHS, ComponentLink2Description=https://datasheet.octopart.com:443/022284245-Molex-datasheet-8337137.pdf?src-supplier=Arrow+Electronics, ComponentLink2URL=https://datasheet.octopart.com:443/022284245-Molex-datasheet-8337137.pdf?src-supplier=Arrow+Electronics, ComponentLink3Description=https://datasheet.octopart.com:443/22-28-4245-Molex-datasheet-16300812.pdf?src-supplier=Molex, ComponentLink3URL=https://datasheet.octopart.com:443/22-28-4245-Molex-datasheet-16300812.pdf?src-supplier=Molex, ComponentLink4Description=https://sigma.octopart.com:443/16300370/technical_drawing/Molex-22-28-4245.pdf?src-supplier=Molex, ComponentLink4URL=https://sigma.octopart.com:443/16300370/technical_drawing/Molex-22-28-4245.pdf?src-supplier=Molex, ComponentLink5Description=https://datasheet.octopart.com:443/22-28-4245-Molex-datasheet-4210.pdf?src-supplier=DigiKey, ComponentLink5URL=https://datasheet.octopart.com:443/22-28-4245-Molex-datasheet-4210.pdf?src-supplier=DigiKey, ComponentLink6Description=http://sigma.octopart.com:80/16300813/rohs_statement/Molex-22-28-4245.pdf?src-supplier=Compliance+Statements, ComponentLink6URL=http://sigma.octopart.com:80/16300813/rohs_statement/Molex-22-28-4245.pdf?src-supplier=Compliance+Statements, ComponentLink7Description=http://sigma.octopart.com:80/reach_statement/Molex-company-74.pdf?src-supplier=Compliance+Statements, ComponentLink7URL=http://sigma.octopart.com:80/reach_statement/Molex-company-74.pdf?src-supplier=Compliance+Statements, ComponentLink8Description=http://sigma.octopart.com:80/rohs_statement/Molex-company-73.pdf?src-supplier=Compliance+Statements, ComponentLink8URL=http://sigma.octopart.com:80/rohs_statement/Molex-company-73.pdf?src-supplier=Compliance+Statements, ComponentLink9Description=http://sigma.octopart.com:80/conflict_mineral_statement/Molex-company-72.pdf?src-supplier=Compliance+Statements, ComponentLink9URL=http://sigma.octopart.com:80/conflict_mineral_statement/Molex-company-72.pdf?src-supplier=Compliance+Statements, Contact Gender=Male, Contact Material=Brass, Contact Plating=Gold, Country of Origin=US, Export Control Classification Number (ECCN) Code=EAR99, Gender=Male, Harmonized Tariff Schedule (HTS) Code=8536.69.40.40, Introduction Date=1994-12-01, Lead Free="Lead Free", Lifecycle Status=Production, Manufacturer Part Number=22-28-4245, Mount="Through Hole", Number of Circuits=24, Number of Contacts=24, Number of Pins=24, Number of Positions=24, Number of Rows=1, Orientation=Vertical, Packaging=Bulk, Pitch=2.54mm, Plating=Tin, Plating Thickness=381nm, Pricing 1="1=1.21, 10=1.024, 100=0.8699, 500=0.77638, 1000=0.73932, 5000=0.65998, 10000=0.62851 (USD)", REACH SVHC=Yes, RoHS=Compliant, Schedule B="8536694040, 8536694040|8536694040|8536694040|8536694040|8536694040", Stock 1=1256, Supplier 1=DigiKey, Terminal Pitch=2.54mm, Termination=Solder
J3 J4: library part 217179-0001, "CONN RCP USB2.0 TYP C 24P SMD RA", Contact Resistance=50mΩ, Current Rating=1.25A, Dielectric Material=Polyamide, Insulation Resistance=100MΩ, LCSC Part Number=C3197684, Manufacturer=Molex, Max Operating Temperature=85°C, Min Operating Temperature=-40°C, Supplier Part Number 1=900-2171790001CT-ND, Voltage Rating=30V, Category="USB Connectors", China RoHS=Compliant, ComponentLink1Description=https://datasheet.octopart.com:443/217179-0001-Molex-datasheet-158871109.pdf?src-supplier=ODG+(Origin+Data+Global), ComponentLink1URL=https://datasheet.octopart.com:443/217179-0001-Molex-datasheet-158871109.pdf?src-supplier=ODG+(Origin+Data+Global), ComponentLink2Description=https://sigma.octopart.com:443/158871110/technical_drawing/Molex-217179-0001.pdf?src-supplier=Upverter, ComponentLink2URL=https://sigma.octopart.com:443/158871110/technical_drawing/Molex-217179-0001.pdf?src-supplier=Upverter, ComponentLink3Description=https://datasheet.octopart.com:443/217179-0001-Molex-datasheet-164573281.pdf?src-supplier=RS+(Formerly+Allied+Electronics), ComponentLink3URL=https://datasheet.octopart.com:443/217179-0001-Molex-datasheet-164573281.pdf?src-supplier=RS+(Formerly+Allied+Electronics), ComponentLink4Description=http://sigma.octopart.com:80/reach_statement/Molex-company-74.pdf?src-supplier=Compliance+Statements, ComponentLink4URL=http://sigma.octopart.com:80/reach_statement/Molex-company-74.pdf?src-supplier=Compliance+Statements, ComponentLink5Description=http://sigma.octopart.com:80/rohs_statement/Molex-company-73.pdf?src-supplier=Compliance+Statements, ComponentLink5URL=http://sigma.octopart.com:80/rohs_statement/Molex-company-73.pdf?src-supplier=Compliance+Statements, ComponentLink6Description=http://sigma.octopart.com:80/conflict_mineral_statement/Molex-company-72.pdf?src-supplier=Compliance+Statements, ComponentLink6URL=http://sigma.octopart.com:80/conflict_mineral_statement/Molex-company-72.pdf?src-supplier=Compliance+Statements, Contact Gender=Female, Contact Material="Gold, Nickel", Country of Origin="Mainland China", Export Control Classification Number (ECCN) Code=EAR99, Gender=Receptacle, Harmonized Tariff Schedule (HTS) Code=8536.69.40.30, Height=3.36mm, Introduction Date=2021-08-30, Lifecycle Status=Production, Manufacturer Part Number=217179-0001, Number of Contacts=16, Number of Pins=16, Number of Ports=1, Number of Rows=1, Pricing 1="1=0.83, 10=0.704, 25=0.6596, 50=0.628, 100=0.598, 250=0.56052, 500=0.53374 (USD)", REACH SVHC=Yes, RoHS=Compliant, Shell Finish=Nickel, Shell Material="Stainless Steel", Stock 1=24454, Supplier 1=DigiKey, Terminal Pitch=500µm, USB Standard="USB 2.0"
J5: "CONN HEADER VERT 3POS 1.27MM", LCSC Part Number=C3333578, Manufacturer=Samtec, Manufacturer Lifecycle Status=PRODUCTION, Supplier Part Number 1=612-FTS-103-01-F-S-ND, Category="Headers and Wire Housings", ComponentLink1Description=https://datasheet.octopart.com:443/FTS-103-01-F-S-Samtec-datasheet-97029283.pdf?src-supplier=Newark, ComponentLink1URL=https://datasheet.octopart.com:443/FTS-103-01-F-S-Samtec-datasheet-97029283.pdf?src-supplier=Newark, ComponentLink2Description=https://datasheet.octopart.com:443/FTS-103-01-F-S-Samtec-datasheet-165596534.pdf?src-supplier=Newark, ComponentLink2URL=https://datasheet.octopart.com:443/FTS-103-01-F-S-Samtec-datasheet-165596534.pdf?src-supplier=Newark, ComponentLink3Description=https://sigma.octopart.com:443/97029285/technical_drawing/Samtec-FTS-103-01-F-S.pdf?src-supplier=element14+APAC, ComponentLink3URL=https://sigma.octopart.com:443/97029285/technical_drawing/Samtec-FTS-103-01-F-S.pdf?src-supplier=element14+APAC, ComponentLink4Description=https://datasheet.octopart.com:443/FTS-103-01-F-S-Samtec-datasheet-118493358.pdf?src-supplier=Electro+Sonic, ComponentLink4URL=https://datasheet.octopart.com:443/FTS-103-01-F-S-Samtec-datasheet-118493358.pdf?src-supplier=Electro+Sonic, ComponentLink5Description=https://datasheet.octopart.com:443/FTS-103-01-F-S-Samtec-datasheet-176663378.pdf?src-supplier=Toby+Electronics, ComponentLink5URL=https://datasheet.octopart.com:443/FTS-103-01-F-S-Samtec-datasheet-176663378.pdf?src-supplier=Toby+Electronics, ComponentLink6Description=https://datasheet.octopart.com:443/FTS-103-01-F-S-Samtec-datasheet-116535195.pdf?src-supplier=Toby+Electronics, ComponentLink6URL=https://datasheet.octopart.com:443/FTS-103-01-F-S-Samtec-datasheet-116535195.pdf?src-supplier=Toby+Electronics, ComponentLink7Description=https://datasheet.octopart.com:443/FTS-103-01-F-S-Samtec-datasheet-136395376.pdf?src-supplier=Toby+Electronics, ComponentLink7URL=https://datasheet.octopart.com:443/FTS-103-01-F-S-Samtec-datasheet-136395376.pdf?src-supplier=Toby+Electronics, ComponentLink8Description=https://datasheet.octopart.com:443/FTS-103-01-F-S-Samtec-datasheet-151470456.pdf?src-supplier=Sager+Electronics, ComponentLink8URL=https://datasheet.octopart.com:443/FTS-103-01-F-S-Samtec-datasheet-151470456.pdf?src-supplier=Sager+Electronics, Contact Plating=Gold, Gender=Male, Lifecycle Status=Production, Manufacturer Part Number=FTS-103-01-F-S, Mount="Through Hole", Number of Contacts=3, Number of Rows=1, Packaging=Bulk, Pitch=1.27mm, Pricing 1="1=0.73, 50=0.6378, 100=0.5407, 500=0.4491, 1000=0.38362, 2000=0.31431, 5000=0.29982 (USD)", Radiation Hardening=No, RoHS=Compliant, Stock 1=179, Supplier 1=DigiKey, Termination=Solder
J6: "CONN HEADER VERT 2POS 1.27MM", LCSC Part Number=C6045317, Manufacturer=Samtec, Manufacturer Lifecycle Status=PRODUCTION, Supplier Part Number 1=SAM15176-ND, Category="Headers and Wire Housings", ComponentLink1Description=https://datasheet.octopart.com:443/FTS-102-01-F-S-Samtec-datasheet-97029283.pdf?src-supplier=Newark, ComponentLink1URL=https://datasheet.octopart.com:443/FTS-102-01-F-S-Samtec-datasheet-97029283.pdf?src-supplier=Newark, ComponentLink2Description=https://sigma.octopart.com:443/97029285/technical_drawing/Samtec-FTS-102-01-F-S.pdf?src-supplier=Newark, ComponentLink2URL=https://sigma.octopart.com:443/97029285/technical_drawing/Samtec-FTS-102-01-F-S.pdf?src-supplier=Newark, ComponentLink3Description=https://datasheet.octopart.com:443/FTS-102-01-F-S-Samtec-datasheet-118493358.pdf?src-supplier=Electro+Sonic, ComponentLink3URL=https://datasheet.octopart.com:443/FTS-102-01-F-S-Samtec-datasheet-118493358.pdf?src-supplier=Electro+Sonic, ComponentLink4Description=https://datasheet.octopart.com:443/FTS-102-01-F-S-Samtec-datasheet-165596534.pdf?src-supplier=JRH+Electronics, ComponentLink4URL=https://datasheet.octopart.com:443/FTS-102-01-F-S-Samtec-datasheet-165596534.pdf?src-supplier=JRH+Electronics, ComponentLink5Description=https://datasheet.octopart.com:443/FTS-102-01-F-S-Samtec-datasheet-176663378.pdf?src-supplier=Toby+Electronics, ComponentLink5URL=https://datasheet.octopart.com:443/FTS-102-01-F-S-Samtec-datasheet-176663378.pdf?src-supplier=Toby+Electronics, ComponentLink6Description=https://datasheet.octopart.com:443/FTS-102-01-F-S-Samtec-datasheet-116535195.pdf?src-supplier=Toby+Electronics, ComponentLink6URL=https://datasheet.octopart.com:443/FTS-102-01-F-S-Samtec-datasheet-116535195.pdf?src-supplier=Toby+Electronics, ComponentLink7Description=https://datasheet.octopart.com:443/FTS-102-01-F-S-Samtec-datasheet-136395376.pdf?src-supplier=Toby+Electronics, ComponentLink7URL=https://datasheet.octopart.com:443/FTS-102-01-F-S-Samtec-datasheet-136395376.pdf?src-supplier=Toby+Electronics, ComponentLink8Description=https://datasheet.octopart.com:443/FTS-102-01-F-S-Samtec-datasheet-151470456.pdf?src-supplier=Sager+Electronics, ComponentLink8URL=https://datasheet.octopart.com:443/FTS-102-01-F-S-Samtec-datasheet-151470456.pdf?src-supplier=Sager+Electronics, Contact Plating=Gold, Gender=Male, Lifecycle Status=Production, Manufacturer Part Number=FTS-102-01-F-S, Mount="Through Hole", Number of Contacts=2, Number of Rows=1, Packaging=Bulk, Pitch=1.27mm, Pricing 1="1=0.49, 50=0.4252, 100=0.3608, 500=0.2994, 1000=0.25609, 2000=0.2244 (USD)", Radiation Hardening=No, RoHS=Compliant, Stock 1=778, Supplier 1=DigiKey, Termination=Solder
Q1 Q2: "TRANS NPN 25V 1.5A SOT-23-3", Case/Package=TO-236-3, Collector Base Voltage (VCBO)=40V, Collector Emitter Breakdown Voltage=25V, Collector Emitter Saturation Voltage=500mV, Emitter Base Voltage (VEBO)=5V, LCSC Part Number=C164886, Manufacturer=Comchip, Max Collector Current=1.5A, Max Junction Temperature (Tj)=150°C, Max Power Dissipation=300mW, Supplier Part Number 1=641-1790-1-ND, Transition Frequency=100MHz, Category=BJTs, Collector Emitter Voltage (VCEO)=25V, ComponentLink1Description=https://datasheet.octopart.com:443/SS8050-G-Comchip-datasheet-180131983.pdf?src-supplier=IHS, ComponentLink1URL=https://datasheet.octopart.com:443/SS8050-G-Comchip-datasheet-180131983.pdf?src-supplier=IHS, ComponentLink2Description=https://datasheet.octopart.com:443/SS8050-G-Comchip-datasheet-155422643.pdf?src-supplier=Upverter, ComponentLink2URL=https://datasheet.octopart.com:443/SS8050-G-Comchip-datasheet-155422643.pdf?src-supplier=Upverter, ComponentLink3Description=https://datasheet.octopart.com:443/SS8050-G-Comchip-datasheet-189767092.pdf?src-supplier=ODG+(Origin+Data+Global), ComponentLink3URL=https://datasheet.octopart.com:443/SS8050-G-Comchip-datasheet-189767092.pdf?src-supplier=ODG+(Origin+Data+Global), Height=1.15mm, hFE Min=40, Lifecycle Status=Production, Manufacturer Part Number=SS8050-G, Max Breakdown Voltage=25V, Max Operating Temperature=150°C, Mount="Surface Mount", Number of Elements=1, Number of Terminals=3, Power Dissipation=300mW, Pricing 1="1=0.24, 10=0.148, 100=0.0921, 500=0.06754, 1000=0.05958 (USD)", REACH SVHC=Yes, RoHS=Compliant, Schedule B=8541100070|8541100070|8541100070|8541100070|8541100070, Stock 1=66834, Supplier 1=DigiKey
R1 R2 R3 R8 R19 R20 R23 R24 R25 R26: library part RC0402JR-070RL, "RES 0 OHM JUMPER 1/16W 0402", Case Code (Imperial)=0402, LCSC Part Number=C60485, Manufacturer="Yageo Group", Max Operating Temperature=155°C, Max Power Dissipation=63mW, Min Operating Temperature=-55°C, Power Dissipation=62.5mW, Resistance=0Ω, Supplier Part Number 1=311-0.0JRCT-ND, Temperature Coefficient=200ppm/°C, Tolerance=5%, Voltage Rating=50V, Case/Package=0402, Category="Chip SMD Resistors", China RoHS=Non-Compliant, ComponentLink1Description=https://datasheet.octopart.com:443/RC0402JR-070RL-Yageo-datasheet-182189538.pdf?src-supplier=IHS, ComponentLink1URL=https://datasheet.octopart.com:443/RC0402JR-070RL-Yageo-datasheet-182189538.pdf?src-supplier=IHS, ComponentLink2Description=https://datasheet.octopart.com:443/RC0402JR-070RL-Yageo-datasheet-10408619.pdf?src-supplier=Newark, ComponentLink2URL=https://datasheet.octopart.com:443/RC0402JR-070RL-Yageo-datasheet-10408619.pdf?src-supplier=Newark, ComponentLink3Description=https://datasheet.octopart.com:443/RC0402JR-070RL-Yageo-Group-datasheet-181964826.pdf?src-supplier=Newark, ComponentLink3URL=https://datasheet.octopart.com:443/RC0402JR-070RL-Yageo-Group-datasheet-181964826.pdf?src-supplier=Newark, ComponentLink4Description=https://datasheet.octopart.com:443/RC0402JR-070RL-Yageo-Group-datasheet-190305687.pdf?src-supplier=Future+Electronics, ComponentLink4URL=https://datasheet.octopart.com:443/RC0402JR-070RL-Yageo-Group-datasheet-190305687.pdf?src-supplier=Future+Electronics, ComponentLink5Description=https://datasheet.octopart.com:443/RC0402JR-070RL-Yageo-datasheet-164759695.pdf?src-supplier=Future+Electronics, ComponentLink5URL=https://datasheet.octopart.com:443/RC0402JR-070RL-Yageo-datasheet-164759695.pdf?src-supplier=Future+Electronics, ComponentLink6Description=https://datasheet.octopart.com:443/RC0402JR-070RL-Yageo-datasheet-137700087.pdf?src-supplier=Future+Electronics, ComponentLink6URL=https://datasheet.octopart.com:443/RC0402JR-070RL-Yageo-datasheet-137700087.pdf?src-supplier=Future+Electronics, ComponentLink7Description=https://datasheet.octopart.com:443/RC0402JR-070RL-Yageo-datasheet-12531192.pdf?src-supplier=Seeed+Studio, ComponentLink7URL=https://datasheet.octopart.com:443/RC0402JR-070RL-Yageo-datasheet-12531192.pdf?src-supplier=Seeed+Studio, ComponentLink8Description=https://datasheet.octopart.com:443/RC0402JR-070RL-Yageo-datasheet-8324527.pdf?src-supplier=TME, ComponentLink8URL=https://datasheet.octopart.com:443/RC0402JR-070RL-Yageo-datasheet-8324527.pdf?src-supplier=TME, ComponentLink9Description=https://datasheet.octopart.com:443/RC0402JR-070RL-Yageo-datasheet-62067350.pdf?src-supplier=Farnell, ComponentLink9URL=https://datasheet.octopart.com:443/RC0402JR-070RL-Yageo-datasheet-62067350.pdf?src-supplier=Farnell, ComponentLink10Description=https://datasheet.octopart.com:443/RC0402JR-070RL-Yageo-datasheet-8329306.pdf?src-supplier=element14, ComponentLink10URL=https://datasheet.octopart.com:443/RC0402JR-070RL-Yageo-datasheet-8329306.pdf?src-supplier=element14, ComponentLink11Description=https://datasheet.octopart.com:443/RC0402JR-070RL-Yageo-datasheet-505231.pdf?src-supplier=element14, ComponentLink11URL=https://datasheet.octopart.com:443/RC0402JR-070RL-Yageo-datasheet-505231.pdf?src-supplier=element14, ComponentLink12Description=https://datasheet.octopart.com:443/RC0402JR-070RL-Yageo-datasheet-175423674.pdf?src-supplier=SOS+electronic, ComponentLink12URL=https://datasheet.octopart.com:443/RC0402JR-070RL-Yageo-datasheet-175423674.pdf?src-supplier=SOS+electronic, ComponentLink13Description=https://datasheet.octopart.com/RC0402JR-070RL-Yageo-datasheet-73766026.pdf, ComponentLink13URL=https://datasheet.octopart.com/RC0402JR-070RL-Yageo-datasheet-73766026.pdf, ComponentLink14Description=http://sigma.octopart.com:80/conflict_mineral_statement/Yageo-company-3.pdf?src-supplier=Compliance+Statements, ComponentLink14URL=http://sigma.octopart.com:80/conflict_mineral_statement/Yageo-company-3.pdf?src-supplier=Compliance+Statements, ComponentLink15Description=http://sigma.octopart.com:80/rohs_statement/Yageo-company-2.pdf?src-supplier=Compliance+Statements, ComponentLink15URL=http://sigma.octopart.com:80/rohs_statement/Yageo-company-2.pdf?src-supplier=Compliance+Statements, Composition="Thick Film", Contact Plating=Tin, Depth=500µm, Features="Moisture Resistant", Height=350µm, Lead Free="Lead Free", Length=1mm, Lifecycle Status=Production, Manufacturer Part Number=RC0402JR-070RL, Military Standard=Not, Mount="Surface Mount", Number of Pins=2, Number of Terminals=2, Number of Terminations=2, Packaging="Tape & Reel", Power Rating=63mW, Pricing 1="1=0.1, 10=0.010, 25=0.0064, 50=0.0054, 100=0.0047, 250=0.00392, 500=0.00346, 1000=0.00304, 5000=0.0023 (USD)", Radiation Hardening=No, REACH SVHC=Yes, RoHS=Compliant, Schedule B="8533290000, 8533290000|8533290000, 8533290000|8533290000|8533290000, 8533290000|8533290000|8533290000|8533290000", Stock 1=11883723, Supplier 1=DigiKey, Termination=SMD/SMT, Voltage Rating (DC)=50V, Width=500µm